# Altium PCB UVandLIGHT.pcbdoc
Units mm, origin at the board's own origin, x right, y up, seen from the top; angles counter-clockwise.
Board outline 74.93 x 82.55 mm, 2 copper layers (Top Layer, Bottom Layer); 20 components, 14 nets, 66 pads, 12 vias.
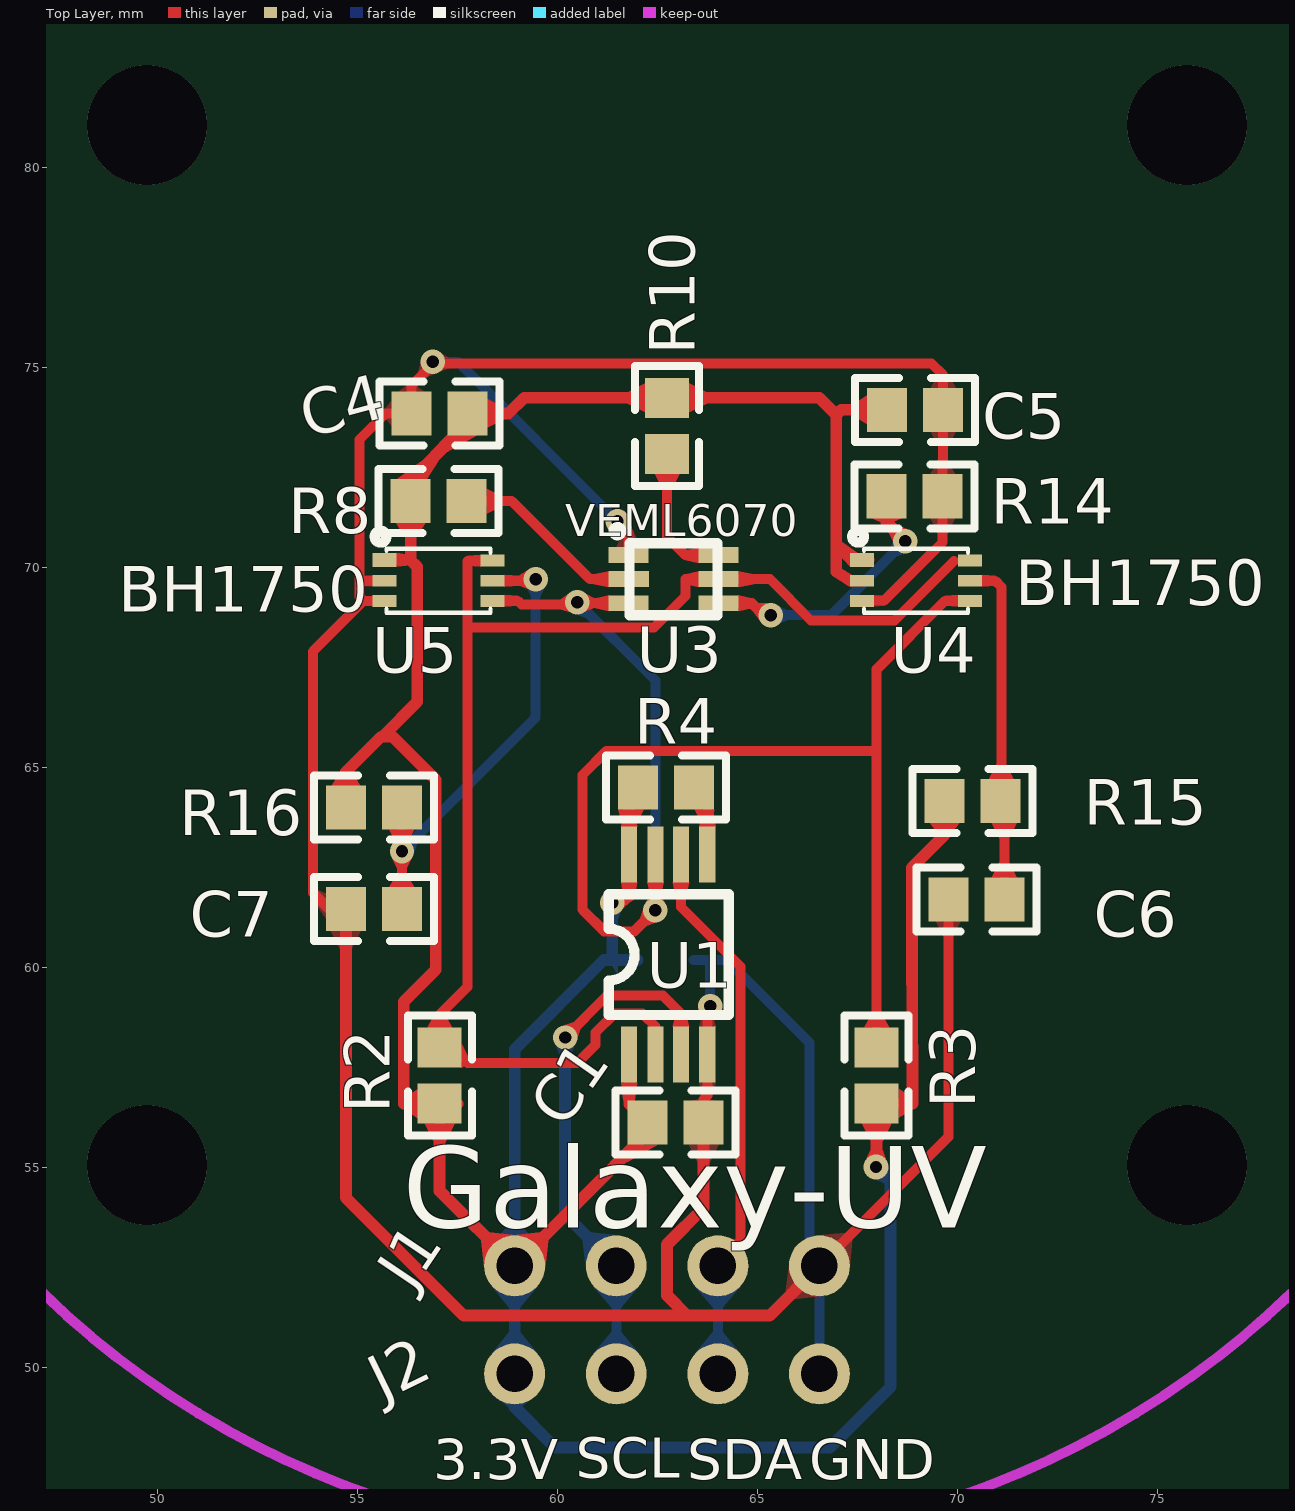
[diagram p0: Top Layer view]
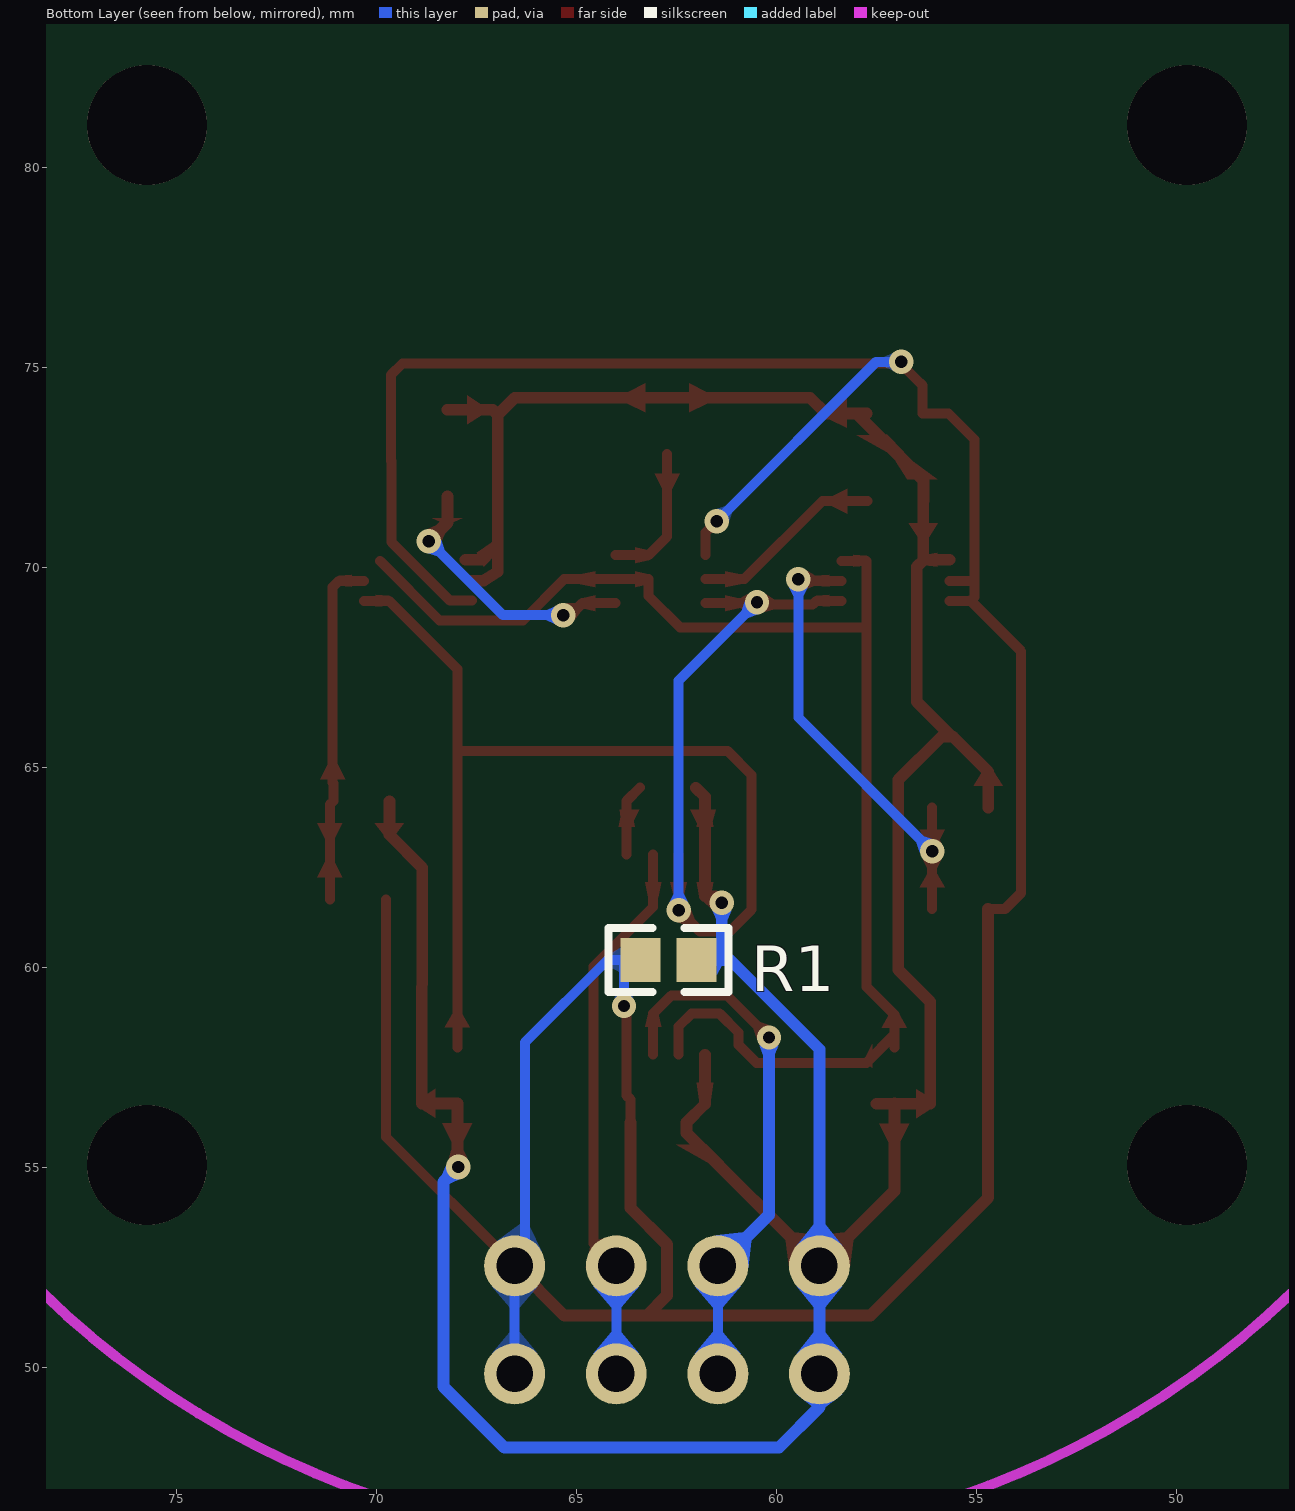
[diagram p1: Bottom Layer view, seen from below]

## Layer stack, top to bottom
Top Layer: signal copper (thickness not stored)
Dielectric: dielectric 0.32, FR-4, Dk 4.8
Bottom Layer: signal copper (thickness not stored)

## Board outline
100.33,25.4 25.4,25.4 25.4,107.95 100.33,107.95

## Components (designator, comment, footprint, x,y, rotation, side; value= is the part's Value field where it differs from the comment)
C1 "CAP-0603" 0603#1 63.754,56.134 r180 top
C4 "0.1uF" 0603#2 57.848,73.862 r180 top
C5 "10uF" 0603#3 68.138,73.952 r0 top
C6 "CAP-0603" 0603#4 69.668,61.712 r0 top
C7 "CAP-0603" 0603#5 54.61,61.468 r0 top
J1 "排针" PIN_4*2.54#1 58.928,52.442 r90 top
J2 "排针" PIN_4*2.54#2 58.928,49.928 r90 top
R1 "100K" 0603#6 63.5,60.198 r0 bottom
R2 "10K" 0603#7 57.056,56.51 r90 top
R3 "10K" 0603#8 67.978,56.51 r90 top
R4 "10K" 0603#4 61.916,64.507 r0 top
R8 "2.2K" 0603#3 56.228,71.672 r0 top
R10 "10R" 0603#9 62.738,72.752 r90 top
R14 "270K" 0603#9 69.728,71.792 r180 top
R15 "1K(102)" 0603#7 69.578,64.172 r0 top
R16 "1K(102)" 0603#4 54.61,64.008 r0 top
U1 "LTC4307CMS8#PBF" MSOP-8 62.768,60.332 r90 top
U3 "VEML6070" ? 62.898,69.718 r0 top
U4 "BH1750FVI-TR" WSOF6I 70.264,70.48 r270 top
U5 "BH1750FVI-TR" WSOF6I 58.326,70.48 r270 top

## Footprints (in the part's own frame and the unit in brackets; to place one, negate y for a bottom-side part, rotate by r counter-clockwise, add the part's x,y. Pads: shape width x height; smd on the part's side, far side on the other; paste and mask are expansions set on the pad)
0603#1 [mm]
  rect 0.998x1.102 smd: 1(0.1,0) 2(1.5,0)
  silkscreen extent -0.7,-0.8 2.3,0.8
0603#2 [mm]
  rect 0.998x1.1 smd: 1(0.1,0)
  rect 1.001x1.1 smd: 2(1.501,0)
  silkscreen extent -0.7,-0.8 2.3,0.8
0603#3 [mm]
  rect 0.998x1.1 smd: 1(0.099,0) 2(1.499,0)
  silkscreen extent -0.7,-0.8 2.3,0.8
0603#4 [mm]
  rect 1.001x1.1 smd: 1(0.101,0.001) 2(1.5,0.001)
  silkscreen extent -0.7,-0.8 2.3,0.8
0603#5 [mm]
  rect 1.001x1.1 smd: 1(0.099,0)
  rect 0.998x1.1 smd: 2(1.5,0)
  silkscreen extent -0.7,-0.8 2.3,0.8
0603#6 [mm]
  rect 1.001x1.1 smd: 1(-0.099,0)
  rect 0.998x1.1 smd: 2(-1.5,0)
  silkscreen extent -2.3,-0.8 0.7,0.8
0603#7 [mm]
  rect 0.998x1.1 smd: 1(0.099,0.001) 2(1.499,0.001)
  silkscreen extent -0.7,-0.8 2.3,0.8
0603#8 [mm]
  rect 0.998x1.102 smd: 1(0.1,0)
  rect 1.001x1.102 smd: 2(1.501,0)
  silkscreen extent -0.7,-0.8 2.3,0.8
0603#9 [mm]
  rect 1.001x1.102 smd: 1(0.101,0) 2(1.5,0)
  silkscreen extent -0.7,-0.8 2.3,0.8
MSOP-8 [mil]
  rect 55x16 smd: 1(-98.45,38.52) 2(-98.45,12.52) 3(-98.45,-12.48) 4(-98.45,-38.48) 5(98.55,-38.48) 6(98.55,-12.48) 7(98.55,12.52) 8(98.55,38.52)
  silkscreen extent -60,-60 60,59
PIN_4*2.54#1 [mil]
  round 60 hole 36: 1(4.32,0) 2(4.32,-100) 3(4.32,-200) 4(4.32,-300)
PIN_4*2.54#2 [mil]
  round 60 hole 36: 1(-3.07,0) 2(-3.07,-100) 3(-3.07,-200) 4(-3.07,-300)
WSOF6I [mil]
  rect 13.8x23.6 smd: 1(11.02,-104.3)
  rect 11.8x23.6 smd: 2(31.52,-104.3) 3(51.22,-104.3) 4(51.22,2) 5(31.52,2) 6(11.82,2)
  silkscreen extent -18,-114 63,0
? [mil]
  rect 39.4x15.7 smd: 1(-44.1,23.63) 2(-44,0.03) 3(-44.1,-23.67) 4(44.5,-23.67) 5(44.5,0.03) 6(44.5,23.63)
  silkscreen extent -59,-35 43,51

## Free pads (board coordinates)
  round 3 hole 3 unplated: ""(49.738,55.072) ""(49.738,81.072) ""(75.738,55.072) ""(75.738,81.072)

## Via types
v1: diameter 0.61, hole 0.31, Top Layer to Bottom Layer, 11 vias
v2: diameter 0.62, hole 0.305, Top Layer to Bottom Layer, 1 vias

## Nets (pads, with @x,y where several pads share a name; then routed paths per layer and width w, separated by ;. In a path a pad name is that pad's centre, name@x,y a point inside that pad or via, vN(x,y) a via of type N, cw(c..) or ccw(c..) an arc to the next point about the centre after c; other vN are vias at no path point)
3.3V: C1.2 C4.1 C5.1 J1.1 J2.1 R1.2 R2.1 R3.1 R4.1 R8.1 R10.2 R15.1 R16.1 U1.1 U1.8 U4.1 U4.2 U5.1 | length 96.9
  Top Layer w0.25: R15.1@69.677,63.672 R15.1
  Top Layer w0.29: R16.1@54.712,64.008 54.712,64.904 55.588,65.78 55.877,65.78 ; U5.1 56.2,70.2 56.322,70.2 ; R8.1@56.33,71.673 56.33,71.224 56.33,70.777 56.33,70.208 56.322,70.2 ; R2.1@57.503,56.608 57.056,56.608 56.159,56.608 56.159,56.611 56.159,59.159 56.957,59.959 56.957,64.701 55.877,65.78 ; C4.1@57.748,73.862 58.772,73.862 ; 58.773,73.863 59.164,74.251 R10.2 66.545,74.251 66.97,73.83 ; v1(61.366,61.628) 61.529,61.79 61.791,61.79 U1.8 61.791,64.282 R4.1 ; U1.1 61.791,56.598 C1.2 ; 66.97,70.598 67.366,70.202 U4.1 ; U4.2@67.615,69.682 67.318,69.682 66.97,69.905 66.97,70.2 66.97,73.83 ; U4.1 U4.1@67.777,70.2 ; R3.1 68.428,56.611 68.875,56.611 68.859,62.509 69.678,63.328 R15.1 ; C5.1 67.394,73.952 67.092,73.952 66.97,73.83 ; 55.877,65.78 55.623,65.78 56.492,66.657 56.492,70.03 56.322,70.2
  Top Layer w0.3: R8.1@56.327,71.673 56.327,72.191 57.996,73.858 C4.1@57.747,73.863 ; R2.1@57.055,56.611 57.055,54.425 J1.1 62.254,55.878 C1.2@62.254,56.134 ; v2(67.958,55.022) 67.978,55.042 R3.1
  Bottom Layer w0.29: J2.1 J1.1 58.928,57.97 61.156,60.198 61.366,60.198 ; v1(61.366,61.628) 61.366,60.198 ; R1.2@62.001,60.198 61.366,60.198
  Bottom Layer w0.3: J2.1 58.928,49.022 59.944,48.006 66.802,48.006 68.326,49.53 68.326,54.654 v2(67.958,55.022)
ACK: R8.2 U3.2 | length 4.9
  Top Layer w0.25: R8.2@57.729,71.673 58.854,71.673 60.808,69.72 U3.2
GND: C1.1 C4.2 C5.2 C6.1 C7.1 J1.4 J2.4 R1.1 R14.1 U1.4 U3.1 U4.3 U5.2 U5.3 | length 98.1
  Top Layer w0.25: C7.1 54.295,61.468 53.884,61.879 53.884,67.917 55.146,69.179 ; U5.3 55.662,69.179 55.364,69.179 55.146,69.179 ; U5.2 55.049,69.679 ; 55.7,73.863 55.049,73.212 55.049,69.679 ; 55.7,73.862 56.348,73.862 56.348,74.559 56.528,74.739 56.901,75.112 69.352,75.112 69.637,74.828 C5.2 69.637,72.679 69.629,72.671 69.629,72.232 R14.1@69.629,71.793 ; v1(61.498,71.163) 61.778,70.884 U3.1 ; C1.1 63.655,56.715 63.746,56.807 U1.4 63.746,58.856 63.815,58.925 v1(63.815,59.049) ; J1.4 69.768,55.772 C6.1 ; U4.3 68.164,69.18 69.088,70.104 69.596,70.612 69.628,70.644 R14.1@69.628,71.792 ; 55.049,69.679 55.049,69.275 55.146,69.179
  Top Layer w0.3: C7.1 54.709,54.256 57.658,51.308 64.008,51.308 64.292,51.308 ; C1.1 63.654,54.002 62.738,53.086 62.738,51.816 63.246,51.308 65.304,51.308 J1.4
  Bottom Layer w0.25: v1(56.879,75.152) 57.509,75.152 v1(61.498,71.163) ; R1.1 R1.1@63.815,60.198 ; v1(63.815,59.049) R1.1@63.815,60.198 ; J2.4 J1.4 66.294,52.552 66.294,58.132 64.229,60.198 R1.1@63.815,60.198
S$67: 
S$69: 
SCL0: J1.2 J2.2 U1.3 | length 13.5
  Top Layer w0.25: v1(60.19,58.26) 61.239,59.309 62.631,59.309 63.086,58.856 U1.3
  Bottom Layer w0.25: J2.2 J1.2
  Bottom Layer w0.3: v1(60.19,58.26) 60.19,53.829 J1.2
SCL1: R2.2 U1.2 U3.5 U4.6 U5.6 | length 34.2
  Top Layer w0.25: R2.2@57.056,58.008 R2.2@57.056,58.328 ; U5.6 57.749,70.18 57.749,68.508 ; U1.2 62.451,58.534 62.128,58.856 61.422,58.856 60.95,58.384 60.95,58.079 60.5,57.63 57.754,57.63 R2.2@57.056,58.328 ; 69.908,70.175 68.425,68.689 66.34,68.689 65.308,69.72 U3.5 63.2,69.72 63.2,69.301 62.41,68.508 57.749,68.508 ; R2.2@57.056,58.328 57.056,58.836 57.749,59.529 57.749,68.508
SDA0: J1.3 J2.3 U1.6 | length 13.8
  Top Layer w0.25: U1.6 63.086,61.523 64.572,60.037 64.572,53.116 J1.3
  Bottom Layer w0.25: J2.3 J1.3
SDA1: R3.2 U1.7 U3.3 U4.4 U5.4 | length 39.1
  Top Layer w0.25: U5.4 59.004,69.179 59.098,69.085 60.457,69.085 v1@60.49,69.118 ; v1(60.49,69.141) v1@60.49,69.118 ; U3.3 60.95,69.118 v1@60.49,69.118 ; U1.7 62.451,61.81 62.446,61.805 v1(62.446,61.442) 61.92,60.916 61.166,60.916 60.625,61.455 60.625,64.823 61.229,65.427 67.978,65.427 ; R3.2 67.978,58.839 67.978,65.427 ; U4.4 69.687,69.179 67.978,67.47 67.978,65.427
  Bottom Layer w0.25: v1(60.49,69.141) 62.446,67.185 v1(62.446,61.442)
U1_5: R4.2 U1.5 | length 1.8
  Top Layer w0.25: R4.2 63.746,64.178 U1.5
U3_4: R14.2 U3.4 | length 6.9
  Top Layer w0.25: U3.4 64.856,69.118 65.155,68.819 v1(65.331,68.819)
  Top Layer w0.3: R14.2 68.228,71.137 v1(68.694,70.671)
  Bottom Layer w0.25: v1(65.331,68.819) 66.841,68.819 v1(68.694,70.671)
U3_6: R10.1 U3.6 | length 3.6
  Top Layer w0.25: R10.1 62.738,70.782 63.2,70.319 U3.6
U4_5: C6.2 R15.2 U4.5 | length 8.7
  Top Layer w0.25: U4.5 70.942,69.679 71.097,69.524 71.097,64.632 71.078,64.613 R15.2 71.168,64.082 C6.2
U5_5: C7.2 R16.2 U5.5 | length 11.8
  Top Layer w0.25: C7.2 56.111,62.344 v1(56.111,62.915) R16.2@56.111,64.008 ; U5.5 59.418,69.679 v1(59.454,69.715)
  Bottom Layer w0.25: v1(56.111,62.915) 59.454,66.26 v1(59.454,69.715)

## Polygon pours and split planes (outlines as drawn)
GND on Bottom Layer (solid): 39.116,94.996 39.116,38.1 86.614,38.354 86.614,94.996 39.116,94.996
GND on Top Layer (solid): 38.1,45.212 38.1,95.25 87.63,95.25 87.376,45.212

## Keep-outs
Keep-Out Layer:
  lines w0.254: 40.238,68.072 cw(c62.738,68.072) 85.238,68.072 cw(c62.738,68.072) 40.238,68.072

## Other copper
Top Layer:
  region net 3.3V: 58.88,53.312 59.688,52.504 59.768,53.179 59.555,53.391
  region net 3.3V: 58.167,52.504 58.976,53.312 58.3,53.391 58.088,53.179
  region net SDA0: 63.96,53.312 64.768,52.504 64.66,53.028 64.483,53.204
  region net 3.3V: 61.642,61.496 61.462,61.917 61.687,61.935 61.81,61.645
  region net SDA1: 62.465,61.138 62.141,61.461 62.064,61.237 62.241,61.06
  region net SDA1: 62.217,61.644 62.675,61.644 62.571,61.805 62.321,61.805
  region net SDA1: 60.321,68.887 60.259,69.34 60.062,69.21 60.096,68.96
  region net SDA1: 60.704,69.358 60.679,68.901 60.898,68.993 60.912,69.243
  region net U5_5: 59.272,69.47 59.233,69.926 59.029,69.804 59.051,69.554
  region net U5_5: 55.882,62.714 56.34,62.714 56.236,62.5 55.986,62.5
  region net U5_5: 55.882,63.117 56.34,63.117 56.236,63.331 55.986,63.331
  region net SCL0: 60.495,58.241 60.171,58.564 60.396,58.642 60.572,58.465
  region net U3_4: 65.258,69.115 65.047,68.71 64.903,68.895 65.024,69.127
  region net U3_4: 68.713,70.976 68.389,70.652 68.294,70.859 68.506,71.071
  region net 3.3V: 68.2,55.216 67.736,55.238 67.828,55.451 68.128,55.436
  region net ACK: 61.28,69.52 61.28,69.919 60.905,69.845 60.905,69.595
  region net SDA1: 61.277,68.918 61.277,69.317 60.95,69.243 60.95,68.993
  region net U3_6: 63.528,70.119 63.528,70.518 63.2,70.444 63.2,70.194
  region net SCL1: 64.529,69.919 64.529,69.52 64.904,69.595 64.904,69.845
  region net SCL1: 63.528,69.52 63.528,69.919 63.2,69.845 63.2,69.595
  region net U3_4: 64.529,69.317 64.529,68.918 64.856,68.993 64.856,69.243
  region net 3.3V: 61.993,57.133 61.587,57.133 61.646,56.698 61.936,56.698
  region net SCL1: 62.247,58.53 62.654,58.53 62.576,58.534 62.326,58.534
  region net SCL0: 62.882,58.53 63.289,58.53 63.211,58.856 62.961,58.856
  region net U1_5: 63.543,63.534 63.949,63.534 63.871,63.909 63.621,63.909
  region net SDA0: 63.289,62.137 62.882,62.137 62.961,61.762 63.211,61.762
  region net SDA1: 62.654,62.137 62.247,62.137 62.326,61.81 62.576,61.81
  region net 3.3V: 61.587,63.534 61.993,63.534 61.936,63.969 61.646,63.969
  region net 3.3V: 61.993,62.137 61.587,62.137 61.646,61.79 61.936,61.79
  region net 3.3V: 56.505,56.246 56.505,56.971 56.159,56.754 56.159,56.464
  region net 3.3V: 57.43,56.111 56.68,56.111 56.905,55.661 57.205,55.661
  region net SCL1: 57.605,58.092 57.605,57.51 57.666,57.541 57.754,57.806
  region net SCL1: 56.743,58.508 57.368,58.508 57.181,58.836 56.931,58.836
  region net 3.3V: 67.738,73.589 67.738,74.314 67.394,74.097 67.394,73.807
  region net 3.3V: 58.248,74.224 58.248,73.499 58.683,73.717 58.683,74.007
  region net 3.3V: 57.999,73.312 57.249,73.337 56.825,72.901 57.235,72.887
  region net 3.3V: 55.977,70.375 55.977,70.024 56.2,70.055 56.2,70.345
  region net SCL1: 58.078,70.029 58.078,70.329 57.749,70.305 57.749,70.055
  region net U5_5: 58.677,69.829 58.677,69.529 59.052,69.554 59.052,69.804
  region net SDA1: 58.677,69.328 58.677,69.029 59.004,69.054 59.004,69.304
  region net U5_5: 55.799,62.018 56.424,62.018 56.236,62.344 55.986,62.344
  region net 3.3V: 54.349,64.558 55.074,64.558 54.857,64.904 54.567,64.904
  region net U5_5: 56.424,63.458 55.799,63.458 55.986,63.083 56.236,63.083
  region net 3.3V: 67.316,70.024 67.493,70.375 67.137,70.636 67,70.363
  region net U4_5: 70.615,69.829 70.615,69.529 70.942,69.554 70.942,69.804
  region net SDA1: 70.016,69.029 70.016,69.328 69.687,69.304 69.687,69.054
  region net 3.3V: 70.041,63.623 69.316,63.623 69.533,63.328 69.823,63.328
  region net U4_5: 70.785,64.723 71.41,64.723 71.222,65.098 70.972,65.098
  region net U4_5: 71.481,63.623 70.856,63.623 71.043,63.248 71.293,63.248
  region net U4_5: 70.856,62.262 71.481,62.262 71.293,62.637 71.043,62.637
  region net U3_6: 63.05,72.352 62.425,72.352 62.613,71.977 62.863,71.977
  region net 3.3V: 63.289,74.614 63.289,73.889 63.724,74.106 63.724,74.396
  region net 3.3V: 62.187,73.889 62.187,74.614 61.752,74.396 61.752,74.106
  region net 3.3V: 68.529,56.974 68.529,56.249 68.875,56.466 68.875,56.756
  region net 3.3V: 68.353,56.111 67.603,56.111 67.828,55.661 68.128,55.661
  region net SDA1: 67.665,58.511 68.29,58.511 68.103,58.839 67.853,58.839
  region net 3.3V: 62.153,63.958 61.515,63.958 61.646,63.523 61.936,63.523
  region net U1_5: 63.915,63.958 63.434,63.958 63.621,63.583 63.871,63.583
  region net 3.3V: 62.505,55.583 61.755,55.598 61.321,55.157 61.737,55.148
  region net U3_4: 68.603,71.241 67.853,71.241 68.078,71.137 68.378,71.137
  region net 3.3V: 56.692,71.122 55.967,71.122 56.185,70.777 56.475,70.777
  region net 3.3V: 55.983,72.222 56.733,72.222 57.02,72.672 56.596,72.672
  region net ACK: 58.227,71.986 58.227,71.361 58.602,71.548 58.602,71.798
Bottom Layer:
  region net 3.3V: 59.499,53.056 58.356,53.056 58.783,53.589 59.073,53.589
  region net 3.3V: 59.499,52.048 58.356,52.048 58.783,51.514 59.073,51.514
  region net SCL0: 62.039,52.048 60.896,52.048 61.343,51.514 61.593,51.514
  region net SCL0: 60.707,52.504 61.516,53.312 60.84,53.391 60.628,53.179
  region net SDA0: 64.579,52.048 63.436,52.048 63.883,51.514 64.133,51.514
  region net 3.3V: 59.499,50.354 58.356,50.354 58.783,50.887 59.073,50.887
  region net 3.3V: 59.499,49.346 58.356,49.346 58.778,49.022 59.078,49.022
  region net SCL0: 62.039,50.354 60.896,50.354 61.343,50.887 61.593,50.887
  region net SDA0: 64.579,50.354 63.436,50.354 63.883,50.887 64.133,50.887
  region net 3.3V: 61.138,61.426 61.595,61.426 61.511,61.212 61.221,61.212
  region net SDA1: 62.217,61.644 62.675,61.644 62.571,61.857 62.321,61.857
  region net SDA1: 60.794,69.16 60.471,68.836 60.695,68.759 60.872,68.936
  region net U5_5: 59.225,69.513 59.683,69.513 59.579,69.3 59.329,69.3
  region net U5_5: 56.416,62.896 56.092,63.22 56.316,63.297 56.493,63.121
  region net SCL0: 59.962,58.058 60.419,58.058 60.34,57.845 60.04,57.845
  region net U3_4: 65.533,68.591 65.533,69.048 65.747,68.944 65.747,68.694
  region net U3_4: 68.713,70.367 68.389,70.691 68.312,70.466 68.488,70.289
  region net 3.3V: 68.267,55.041 67.939,54.713 68.15,54.618 68.362,54.83
  region net 3.3V: 61.501,60.56 61.501,59.835 61.366,60.053 61.366,60.343

## Silkscreen, mask and mechanical layers (free items; w line width, h text height)
Top Overlay:
  text "VEML6070" at 60.198,70.793 h0.8
  text "BH1750" at 71.438,69.066 h1.14
  text "BH1750" at 49.022,68.908 h1.14
  text "Galaxy-UV" at 56.134,53.501 h2.03
  text "SCL" at 60.452,47.252 h1
  text "3.3V" at 56.896,47.214 h1
  text "SDA" at 63.246,47.214 h1
  text "GND" at 66.294,47.214 h1
Document:
  lines w0.003: 62.84,66.65 62.89,66.7